# Altium PCB PCB1.PcbDoc
Units mil, origin at the board's own origin, x right, y up, seen from the top; angles counter-clockwise.
Board outline 2470 x 2110 mil, 2 copper layers (Top Layer, Bottom Layer); 16 components, 12 nets, 36 pads, 0 vias.
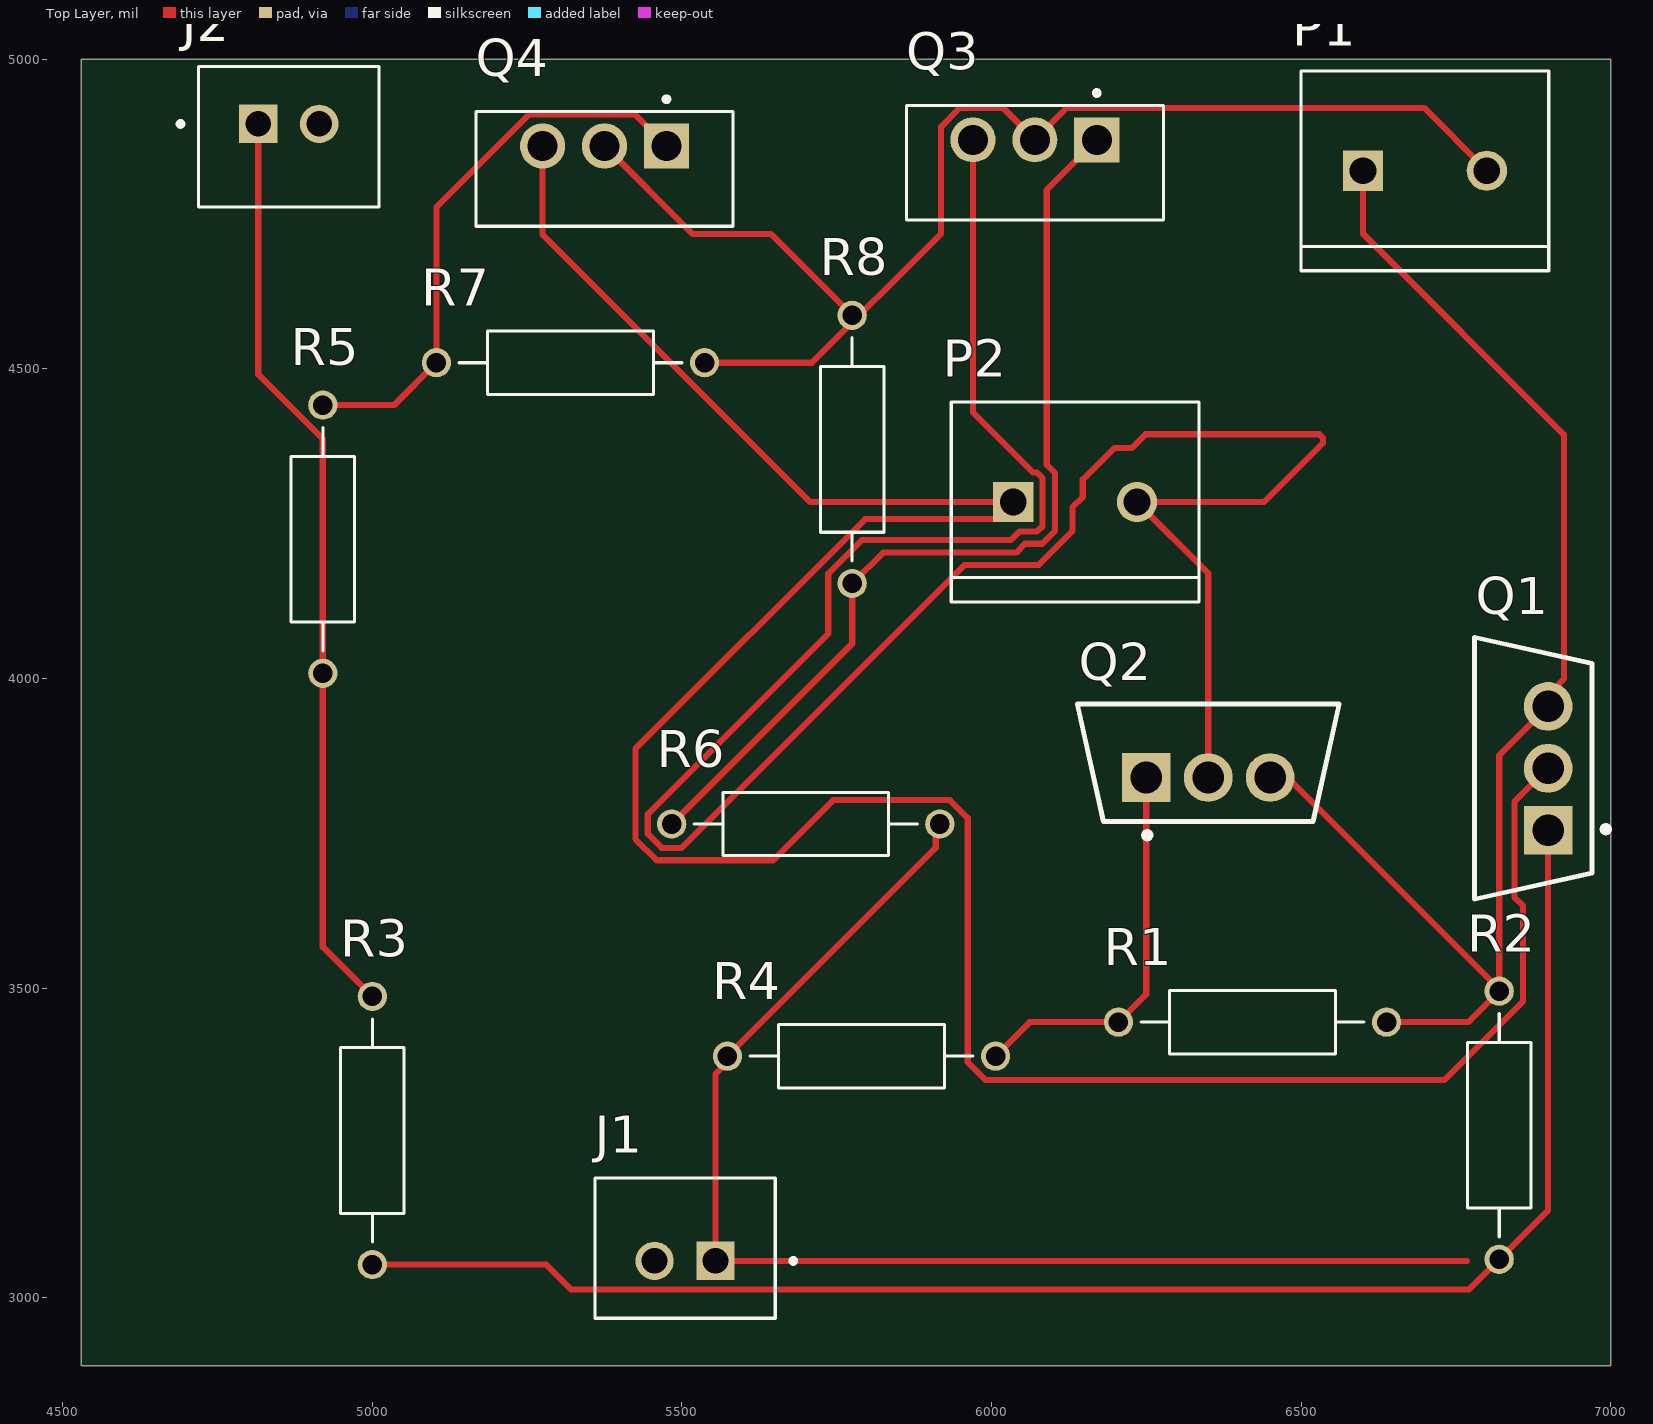
[diagram p0: Top Layer view]
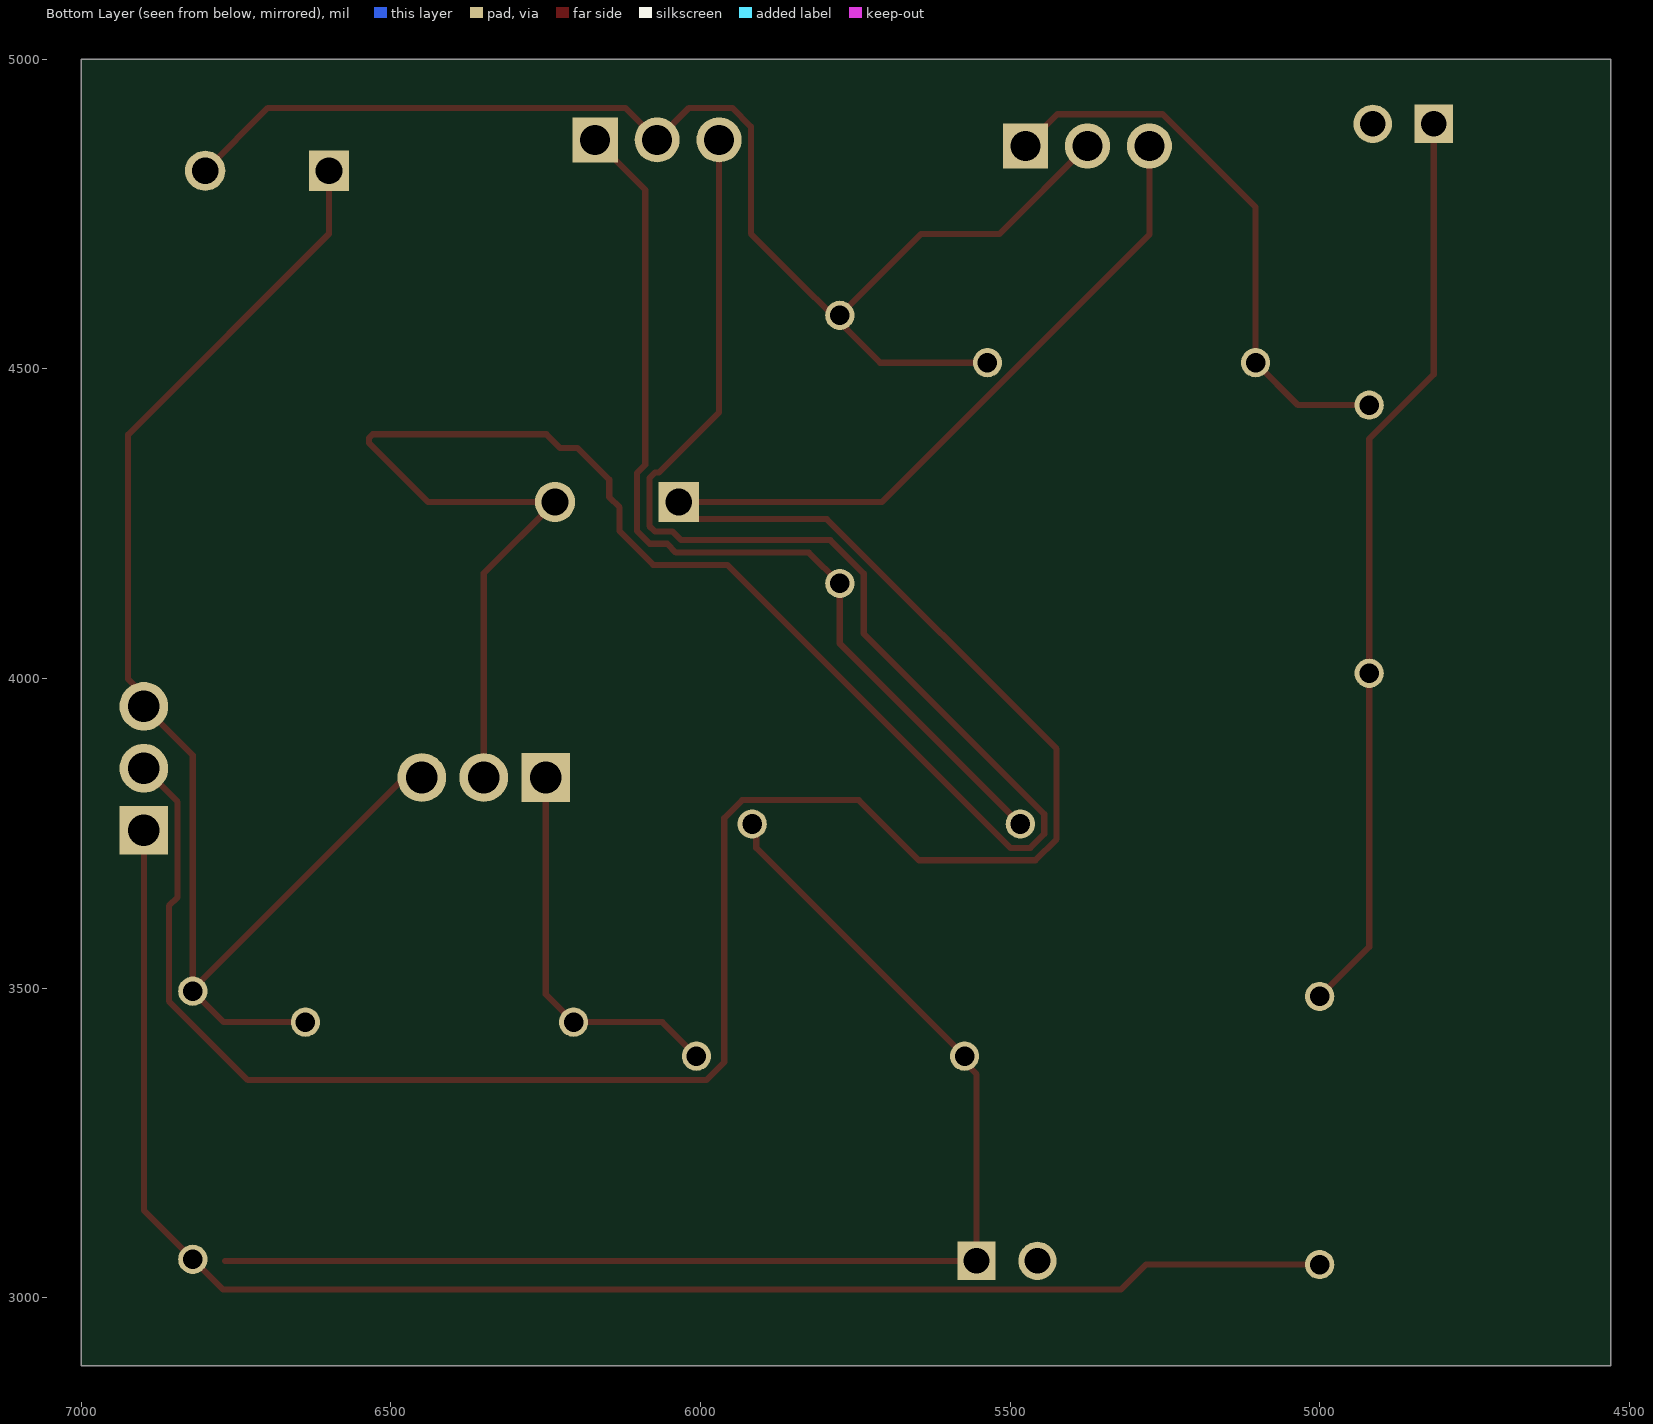
[diagram p1: Bottom Layer view, seen from below]
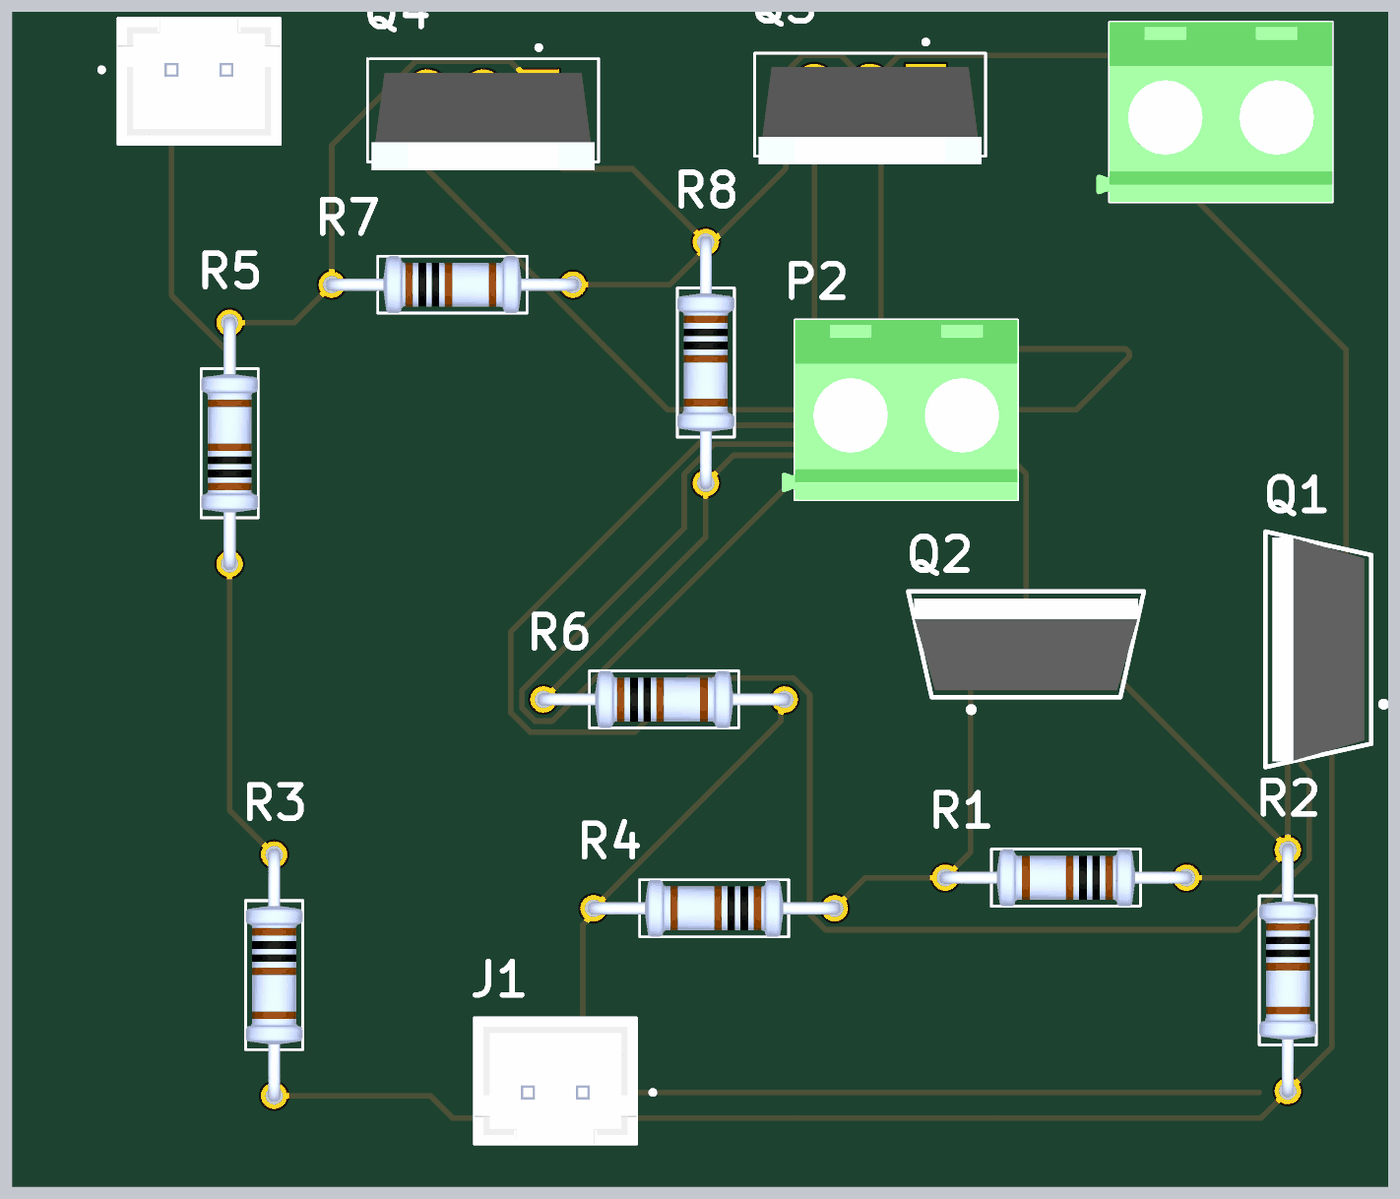
[diagram p2: 3D render of the assembled board from above, using the file's embedded part models]

## Layer stack, top to bottom
Top Solder: solder mask 0.4, Solder Resist, Dk 3.5
Top Layer: signal copper 1.4
Dielectric 1: dielectric 12.6, FR-4, Dk 4.8
Bottom Layer: signal copper 1.4
Bottom Solder: solder mask 0.4, Solder Resist, Dk 3.5

## Board outline
4530,2890 7000,2890 7000,5000 4530,5000

## Design rules (kind name [scope] priority, off if disabled: settings)
Clearance [All] p1: gap=10 ignorepadtopadclearanceinfootprint=FALSE
PolygonConnect [All] p1: connectstyle=Relief reliefconductorwidth=10 reliefentries=4 polygonreliefangle="90 Angle" airgapwidth=10
RoutingVias [All] p1: holewidth=28 width=50 viastyle="Through Hole" minholewidth=28 minwidth=50 maxholewidth=28 maxwidth=50
SolderMaskExpansion [All] p1: expansion=4 istentingtop=FALSE
SupplyNets "Schematic Supply Nets_1" [InNet('+12')] p1: voltage=0.000
SupplyNets "Schematic Supply Nets" [InNet('GND')] p2: voltage=0.000
Width [All] p1: maxlimit=10 minlimit=10 preferedwidth=10
30 further rules are at their usual default settings.

## Components (designator, comment, footprint, x,y, rotation, side; value= is the part's Value field where it differs from the comment)
J1 "B2B-XH-A_(LF)(SN)" JST_B2B-XH-A_(LF)(SN) 5505,3080 r0 top
J2 "B2B-XH-A_(LF)(SN)" JST_B2B-XH-A_(LF)(SN) 4865,4875 r180 top
P1 "282837-2" TE_282837-2 6700,4820 r0 top
P2 "282837-2" TE_282837-2 6135,4285 r0 top
Q1 "IRF4905PBF" FP-PG-TO220-3-MFG 6875,3855 r180 top
Q2 "IRF4905PBF" FP-PG-TO220-3-MFG 6350,3864.02 r90 top
Q3 "IRLZ44N" TO254P1054X469X1930-3 6070,4832.99 r180 top
Q4 "IRLZ44N" TO254P1054X469X1930-3 5375,4822.99 r180 top
R1 "10KOhms" RESAD1100W55L680D260 6421.54,3445 r180 top
R2 "10KOhms" RESAD1100W55L680D260 6820,3278.46 r270 top
R3 "500Ohms" RESAD1100W55L680D260 5000,3270 r270 top
R4 "500Ohms" RESAD1100W55L680D260 5790,3390 r180 top
R5 "500Ohms" RESAD1100W55L680D260 4920,4225 r90 top
R6 "500Ohms" RESAD1100W55L680D260 5700,3765 r0 top
R7 "10KOhms" RESAD1100W55L680D260 5320,4510 r0 top
R8 "10KOhms" RESAD1100W55L680D260 5775,4370 r270 top

## Footprints (in the part's own frame and the unit in brackets; to place one, negate y for a bottom-side part, rotate by r counter-clockwise, add the part's x,y. Pads: shape width x height; smd on the part's side, far side on the other; paste and mask are expansions set on the pad)
FP-PG-TO220-3-MFG [mm]
  rect 2x2 hole 1.3 paste-2539.97 mask+0: 1(-0.61,2.54)
  round 2 hole 1.3 paste-2539.97 mask+0: 2(-0.61,0) 3(-0.61,-2.54)
  silkscreen extent -3.1,-5.38 2.41,5.38, body extent -2.51,-5.48 2.51,5.48, height 0.25
JST_B2B-XH-A_(LF)(SN) [mm]
  rect 1.575x1.575 / inner round 1.575 / far side rect 1.575x1.575 hole 1.05: 1(1.25,-0.525)
  round 1.575 hole 1.05: 2(-1.25,-0.525)
  silkscreen extent -3.7,-2.88 4.54,2.88, body extent -3.7,-2.88 3.7,2.88, height 7
RESAD1100W55L680D260 [mm]
  round 1.2 hole 0.8: 1(-5.5,0) 2(5.5,0)
  silkscreen extent -4.58,-1.3 4.58,1.3, body extent -5.77,-1.3 5.77,1.3, height 2.6
TE_282837-2 [mm]
  rect 1.65x1.65 / inner round 1.65 / far side rect 1.65x1.65 hole 1.1: 1(-2.54,0)
  round 1.65 hole 1.1: 2(2.54,0)
  silkscreen extent -5.08,-4.1 5.08,4.1, body extent -5.68,-4.1 5.08,4.1, height 10
TO254P1054X469X1930-3 [mm]
  rect 1.85x1.85 / inner round 1.85 / far side rect 1.85x1.85 hole 1.23: 1(-2.54,-0.94)
  round 1.85 hole 1.23: 2(0,-0.94) 3(2.54,-0.94)
  silkscreen extent -5.27,-2.96 5.27,2.35, body extent -5.08,-1.71 5.08,2.73, height 15.01

## Part data
J1 J2: "Connector Header Through Hole 2 position 0.098 (2.50mm)", Package=None, Check_prices=https://www.snapeda.com/parts/B2B-XH-A%20(LF)(SN)/JST+Sales+America+Inc./view-part/?ref=eda, MF="JST Sales", MP="B2B-XH-A (LF)(SN)", SnapEDA_Link=https://www.snapeda.com/parts/B2B-XH-A%20(LF)(SN)/JST+Sales+America+Inc./view-part/?ref=snap
P1 P2: "Ð Ð°Ð·ÑŠÐµÐ¼Ð½Ñ‹Ðµ ÐºÐ»ÐµÐ¼Ð¼Ð½Ñ‹Ðµ ÐºÐ¾Ð»Ð¾Ð´ÐºÐ¸ Ð Ð¾Ð·ÐµÑ‚ÐºÐ° 2 Ð¿Ð¾Ð»Ð¾Ð¶ÐµÐ½Ð¸Ñ 5,08 Ð¼Ð¼ ÐŸÑ€Ð¸Ð¿Ð¾Ð¹ Ð¿Ñ€ÑÐ¼Ð¾Ð¹ Ñ‡ÐµÑ€ÐµÐ· Ð¾Ñ‚Ð²ÐµÑ€ÑÑ‚Ð¸Ðµ 13,5 Ð / ÐºÐ¾Ð½Ñ‚Ð°ÐºÑ‚", Package=None, Availability="In Stock", Check_prices=https://www.snapeda.com/parts/282837-2/TE+Connectivity+AMP+Connectors/view-part/?ref=eda, MF="TE Connectivity", MP=282837-2, Price=None, Purchase-URL=https://pricing.snapeda.com/search/part/282837-2/?ref=eda, SnapEDA_Link=https://www.snapeda.com/parts/282837-2/TE+Connectivity+AMP+Connectors/view-part/?ref=snap
Q1 Q2: library part CMP-32901-000200-1, "MOSFET P-CH 55V 74A TO-220AB", Case/Package=TO-220, Continuous Drain Current (ID)=74A, Drain to Source Breakdown Voltage=-55V, Drain to Source Resistance=20mR, Gate to Source Voltage (Vgs)=20V, Input Capacitance=3.4nF, Max Operating Temperature=175°C, Max Power Dissipation=200W, Min Operating Temperature=-55°C, Threshold Voltage=-4V, Drain to Source Voltage (Vdss)=-55V, Element Configuration=Single, Halogen Free="Halogen Free", Height=0.6inch, Lead Free="Lead Free", Length=0.414inch, Max Dual Supply Voltage=-55V, Mount="Through Hole", Number of Pins=3, Packaging=Rail/Tube, Power Dissipation=200W, Rds On Max=20mR, REACH SVHC="No SVHC", RoHS Compliant=Yes, Turn-Off Delay Time=61ns, Turn-On Delay Time=18ns, Width=0.185inch
Q3 Q4: "N-Channel 55 V 47A (Tc) 3.8W (Ta), 110W (Tc) Surface Mount D2PAK", Package="TO-220-3 Infineon / IR", Availability="Not in stock", Check_prices=https://www.snapeda.com/parts/IRLZ44N/Infineon/view-part/?ref=eda, MF="Infineon / IR", MP=IRLZ44N, Price=None, SnapEDA_Link=https://www.snapeda.com/parts/IRLZ44N/Infineon/view-part/?ref=snap
R1 R2 R3 R4 R5 R6 R7 R8: library part MFR-25FBF52-10K, "10.2 kOhms Â±1% 0.25W, 1/4W Through Hole Resistor Axial - Metal Film", Package="Axial Yageo", Availability="In Stock", Check_prices=https://www.snapeda.com/parts/MFR-25FBF52-10K/Yageo/view-part/?ref=eda, MF=Yageo, MP=MFR-25FBF52-10K, Price=None, Purchase-URL=https://pricing.snapeda.com/search/part/MFR-25FBF52-10K/?ref=eda, SnapEDA_Link=https://www.snapeda.com/parts/MFR-25FBF52-10K/Yageo/view-part/?ref=snap

## Nets (pads, with @x,y where several pads share a name; then routed paths per layer and width w, separated by ;. In a path a pad name is that pad's centre, name@x,y a point inside that pad or via, vN(x,y) a via of type N, cw(c..) or ccw(c..) an arc to the next point about the centre after c; other vN are vias at no path point)
+12: P1.1 Q1.3 Q2.3 R1.1 R2.1 | length 2241.5
  Top Layer w10: Q2.3@6441.72,3860 6458.28,3860 R2.1@6820,3498.28 ; P1.1 6600,4718.24 6924.37,4393.87 6924.37,3998.96 6899.02,3973.6 Q1.3 6820,3875.98 R2.1@6820,3498.28 ; R1.1@6632.3,3450.77 R1.1 6770,3445 R2.1 R2.1@6820,3498.28
GND: P1.2 Q3.2 Q4.2 R7.2 R8.1 | length 2132.9
  Top Layer w10: Q4.2 5516.94,4718.06 5643.48,4718.06 R8.1 ; R7.2 5710,4510 5918.58,4718.58 5918.58,4891.3 5948.7,4921.42 6018.58,4921.42 Q3.2 6121.42,4921.42 6698.58,4921.42 P1.2
MCU2: J1.1 R4.2 R6.2 | length 2069.5
  Top Layer w10: R6.2 5909.84,3758.31 5909.84,3726.38 R4.2 5573.46,3379.92 5554.21,3360.67 J1.1 6767.98,3059.33
"MCU 1": J2.1 R3.1 R5.1 | length 1485.4
  Top Layer w10: J2.1 4815.79,4491.13 4920,4386.92 R5.1 4920,3566.54 R3.1
"MCU 1 GND": J2.2
"MCU 2 GND": J1.2
NetP2_1: P2.1 Q1.2 Q4.3 | length 4366.5
  Top Layer w10: Q4.3 5275,4716.92 5706.92,4285 P2.1 6007.52,4257.52 5796.15,4257.52 5424.84,3886.21 5424.84,3740.72 5459.18,3706.38 5647.24,3706.38 5744.48,3803.62 5932.53,3803.62 5961.54,3774.62 5961.54,3380.38 5990.54,3351.38 6731,3351.38 6858.62,3479 6858.62,3632.8 6844.65,3646.78 6844.65,3800.63 Q1.2
NetP2_2: P2.2 Q2.2 Q3.3 | length 3851.4
  Top Layer w10: Q3.3 5970,4430 6067.52,4332.48 6073.69,4332.48 6082.48,4323.69 6082.48,4246.31 6073.69,4237.52 6045.41,4237.52 6031.34,4223.45 5790.36,4223.45 5736.38,4169.46 5736.38,4072.53 5444.84,3781 5444.84,3749 5467.47,3726.38 5499.46,3726.38 5956.53,4183.45 6076.19,4183.45 6130.76,4238.02 6130.76,4276.2 6147.52,4292.95 6147.52,4321.24 6198.76,4372.48 6227.05,4372.48 6248.94,4394.37 6529.37,4394.37 6535.23,4388.51 6535.23,4380.23 6440,4285 P2.2 6350,4170 Q2.2
NetQ1_1: Q1.1 R2.2 R3.2 | length 2582.6
  Top Layer w10: R3.2 5280.69,3053.46 5320.82,3013.33 6771.4,3013.33 R2.2 6899.02,3140.94 Q1.1
NetQ2_1: Q2.1 R1.2 R4.1 | length 634.9
  Top Layer w10: R4.1 6061.54,3445 R1.2 6250,3490 Q2.1
NetQ3_1: Q3.1 R6.1 R8.2 | length 1542.8
  Top Layer w10: R6.1 5775,4056.54 R8.2 5824.98,4203.45 6039.62,4203.45 6053.69,4217.52 6081.98,4217.52 6102.48,4238.02 6102.48,4331.98 6089.1,4345.36 6089.1,4789.1 Q3.1
NetQ4_1: Q4.1 R5.2 R7.1 | length 918.1
  Top Layer w10: R5.2 5035,4441.54 R7.1 5103.46,4761.18 5253.7,4911.42 5423.58,4911.42 Q4.1